# EAGLE board PIC16F628-4-RGB-LED-DR1r3 (EAGLE 5.06)
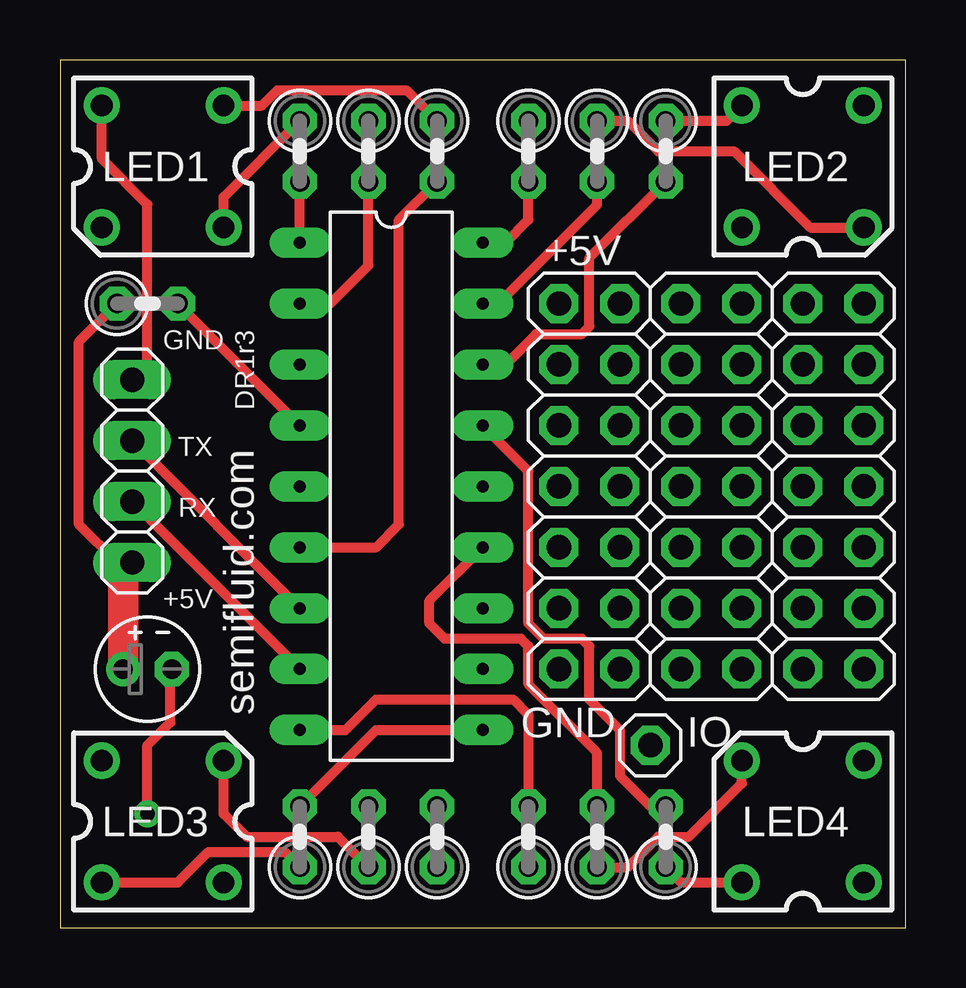
[diagram p0: board, top side]
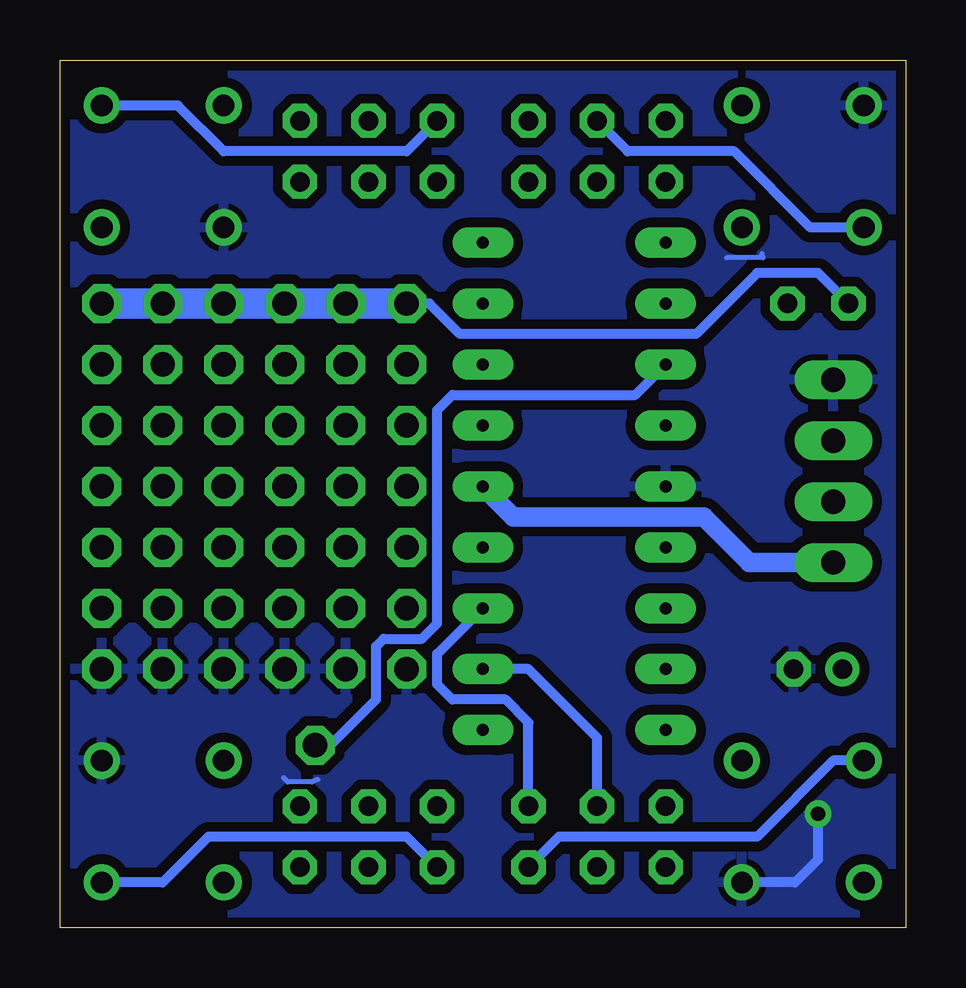
[diagram p1: board, bottom side, seen from below]

Size 35.23 x 36.18 mm. Coordinates in mm from the lower left corner, seen from the top.
Outline: 0,0 35.23,0 35.23,36.18 0,36.18 0,0
Copper layers (1*16): Top 0.035mm / dielectric 1.5mm / Bottom 0.035mm
Design rules "SparkFun": minimum track width 8mil, minimum drill 20mil, track to track 8mil, track to pad 8mil, pad to pad 8mil, via to via 8mil, smd to smd 8mil, copper to edge 10mil, drill to drill 8mil, minimum pad ring 12mil, minimum via ring 10mil, stop-mask expansion 4mil, vias tented up to drill 25mil, thermal gap 10mil

## Footprints (pad centres in the part's own frame; a part is rotated, then mirrored left to right if it is on the bottom)
E2-4 = drill 0.813 pad 1.27 round: + -1.016,0 | drill 0.813 pad 1.27 octagon: - 1.016,0
1X01 = drill 1.016 octagon: 1 0,0
1X04 = drill 1.016 long: 1 -3.81,0; 2 -1.27,0; 3 1.27,0; 4 3.81,0
2X07 = drill 1.016 octagon: 1 -7.62,-1.27; 2 -7.62,1.27; 3 -5.08,-1.27; 4 -5.08,1.27; 5 -2.54,-1.27; 6 -2.54,1.27; 7 0,-1.27; 8 0,1.27; 9 2.54,-1.27; 10 2.54,1.27; 11 5.08,-1.27; 12 5.08,1.27; 13 7.62,-1.27; 14 7.62,1.27
SUPERFLUX-7.6X7.6 = drill 0.9 pad 1.422 round: 1 -2.54,2.54; 2 2.54,2.54; 3 -2.54,-2.54; 4 2.54,-2.54
0207/2V = drill 0.813 octagon: 1 -1.27,0; 2 1.27,0
DIL18 = drill 0.5 pad 1.27 long: 1 -10.16,-3.81; 2 -7.62,-3.81; 3 -5.08,-3.81; 4 -2.54,-3.81; 5 0,-3.81; 6 2.54,-3.81; 7 5.08,-3.81; 8 7.62,-3.81; 9 10.16,-3.81; 10 10.16,3.81; 11 7.62,3.81; 12 5.08,3.81; 13 2.54,3.81; 14 0,3.81; 15 -2.54,3.81; 16 -5.08,3.81; 17 -7.62,3.81; 18 -10.16,3.81

## Placement (x,y rotation side)
C1  [E2-4]  3.65,10.79 0 top
IO  [1X01]  24.6,7.62 0 top
JP1  [1X04]  3.01,19.05 90 top
JP2  [2X07]  32.22,18.41 90 top
JP3  [2X07]  27.14,18.41 90 top
JP4  [2X07]  22.06,18.41 90 top
LED1  [SUPERFLUX-7.6X7.6]  4.28,31.75 0 top
LED2  [SUPERFLUX-7.6X7.6]  30.95,31.75 90 top
LED3  [SUPERFLUX-7.6X7.6]  4.28,4.44 180 top
LED4  [SUPERFLUX-7.6X7.6]  30.95,4.44 270 top
R1  [0207/2V]  10,32.38 270 top
R2  [0207/2V]  12.85,32.38 270 top
R3  [0207/2V]  15.71,32.38 270 top
R4  [0207/2V]  19.52,32.38 270 top
R5  [0207/2V]  22.38,32.38 270 top
R6  [0207/2V]  25.23,32.38 270 top
R7  [0207/2V]  15.71,3.81 90 top
R8  [0207/2V]  12.85,3.81 90 top
R9  [0207/2V]  10,3.81 90 top
R10  [0207/2V]  25.23,3.81 90 top
R11  [0207/2V]  22.38,3.81 90 top
R12  [0207/2V]  19.52,3.81 90 top
R13  [0207/2V]  3.65,26.03 0 top
U$1  PIC16F628  [DIL18]  13.81,18.41 270 top

## Library data of the parts
C1 R1-R13 = rcl
IO JP1-JP4 = pinhead
LED1-LED4 = superfluxled
U$1 = microchip-5

## Nets
5V: C1.+ JP1.1 JP2.13 JP2.14 JP3.13 JP3.14 JP4.13 JP4.14 R13.1 U$1.14
GND: C1.- JP1.4 JP2.1 JP2.2 JP3.1 JP3.2 JP4.1 JP4.2 LED1.1 LED2.1 LED3.1 LED4.1 U$1.5
N$1: IO.1 U$1.3
N$2: R1.2 U$1.1
N$3: LED2.4 R4.1
N$4: LED2.3 R5.1
N$6: R2.2 U$1.2
N$7: R3.2 U$1.6
N$8: R4.2 U$1.18
N$9: R5.2 U$1.17
N$10: R6.2 U$1.16
N$11: LED3.4 R7.1
N$12: LED3.3 R8.1
N$13: LED3.2 R9.1
N$14: LED4.4 R10.1
N$15: LED4.3 R11.1
N$16: LED4.2 R12.1
N$17: JP1.3 U$1.7
N$18: JP1.2 U$1.8
N$19: LED2.2 R6.1
N$20: LED1.4 R1.1
N$21: LED1.3 R2.1
N$22: LED1.2 R3.1
N$23: R7.2 U$1.12
N$24: R8.2 U$1.11
N$25: R9.2 U$1.10
N$26: R10.2 U$1.15
N$27: R12.2 U$1.9
N$28: R11.2 U$1.13
N$29: R13.2 U$1.4

## Tracks (layer width: path | path; a pad name or v marks a point on that pad's centre or on a via)
5V
  Top 0.406: JP1.1 2.38,15.23 0.79,16.82 0.79,24.44 R13.1
  Top 1.27: C1.+ 2.63,14.85 JP1.1
  Bottom 0.406: JP4.14 19.84,26.03 18.57,24.76 8.73,24.76 6.18,27.3 3.65,27.3 R13.1
  Bottom 0.813: JP1.1 6.5,15.23 8.41,17.14 16.35,17.14 U$1.14
  Bottom 1.27: JP4.14 JP4.13 JP3.14 JP3.13 JP2.14 JP2.13
GND  (via drill 0.6)
  Top 0.406: v3.65,4.76 3.65,7.62 4.6,8.57 4.6,10.73 C1.- | LED1.1 1.74,32.06 3.65,30.16 3.65,23.49 JP1.4
  Bottom 0.203: 7.46,27.94 5.93,27.94 5.98,28.11 | 25.91,6.26 25.74,6.09 24.73,6.09 24.48,6.19
  Bottom 0.406: LED3.1 4.6,1.9 3.65,2.85 v3.65,4.76
  pour Bottom (isolate 0.406): 0.79,35.55 0.47,35.55 0.47,0.63 34.76,0.63 34.76,35.55
N$1
  Bottom 0.406: IO.1 23.96,7.62 22.06,9.52 22.06,11.74 21.74,12.06 20.16,12.06 19.52,12.69 19.52,21.59 18.89,22.22 11.27,22.22 U$1.3
N$2
  Top 0.406: U$1.1 R1.2
N$3
  Bottom 0.406: LED2.4 30.32,34.28 28.41,32.38 20.79,32.38 R4.1
N$4
  Top 0.406: LED2.3 31.27,29.21 28.09,32.38 24.92,32.38 23.65,33.65 R5.1
N$6
  Top 0.406: U$1.2 11.27,26.03 12.85,27.62 R2.2
N$7
  Top 0.406: U$1.6 13.17,15.87 14.12,16.82 14.12,29.52 R3.2
N$8
  Top 0.406: U$1.18 18.57,28.57 19.52,29.52 R4.2
N$9
  Top 0.406: U$1.17 18.25,26.03 22.38,30.16 R5.2
N$10
  Top 0.406: U$1.16 18.57,23.49 19.84,24.76 21.74,24.76 22.06,25.08 22.06,27.94 R6.2
N$11
  Bottom 0.406: LED3.4 3.01,6.98 6.18,3.81 14.44,3.81 R7.1
N$12
  Top 0.406: LED3.3 6.82,4.76 7.77,3.81 11.58,3.81 R8.1
N$13
  Top 0.406: LED3.2 4.92,1.9 6.18,3.17 9.36,3.17 R9.1
N$14
  Top 0.406: LED4.4 25.87,1.9 R10.1
N$15
  Top 0.406: LED4.3 28.41,6.03 26.19,3.81 24.92,3.81 23.65,2.54 R11.1
N$16
  Bottom 0.406: LED4.2 30.95,1.9 29.05,3.81 20.79,3.81 R12.1
N$17
  Top 0.406: JP1.3 U$1.7
N$18
  Top 0.406: JP1.2 U$1.8
N$19
  Top 0.406: R6.1 27.78,33.65 LED2.2
N$20
  Top 0.406: LED1.4 6.82,30.48 R1.1
N$21
  Bottom 0.406: LED1.3 3.96,29.21 7.14,32.38 11.58,32.38 R2.1
N$22
  Top 0.406: LED1.2 8.41,34.28 9.04,34.92 14.44,34.92 R3.1
N$23
  Bottom 0.406: U$1.12 19.52,11.42 19.52,10.15 18.89,9.52 16.66,9.52 15.71,8.57 R7.2
N$24
  Bottom 0.406: U$1.11 15.71,10.79 12.85,7.93 R8.2
N$25
  Top 0.406: U$1.10 13.17,8.25 R9.2
N$26
  Top 0.406: R10.2 24.6,5.08 23.33,6.34 23.33,8.25 22.06,9.52 22.06,11.74 21.74,12.06 20.16,12.06 19.52,12.69 19.52,19.05 U$1.15
N$27
  Top 0.406: U$1.9 11.9,8.25 13.17,9.52 18.89,9.52 19.52,8.88 R12.2
N$28
  Top 0.406: R11.2 22.38,7.3 19.52,10.15 19.52,11.74 19.2,12.06 16.03,12.06 15.39,12.69 15.39,13.65 U$1.13
N$29
  Top 0.406: R13.2 U$1.4

## Text on the board
tNames: +5V | GND | DR1r3 | TX | RX | +5V | semifluid.com | GND